# EAGLE board M5StickSub (EAGLE 9.6.2)
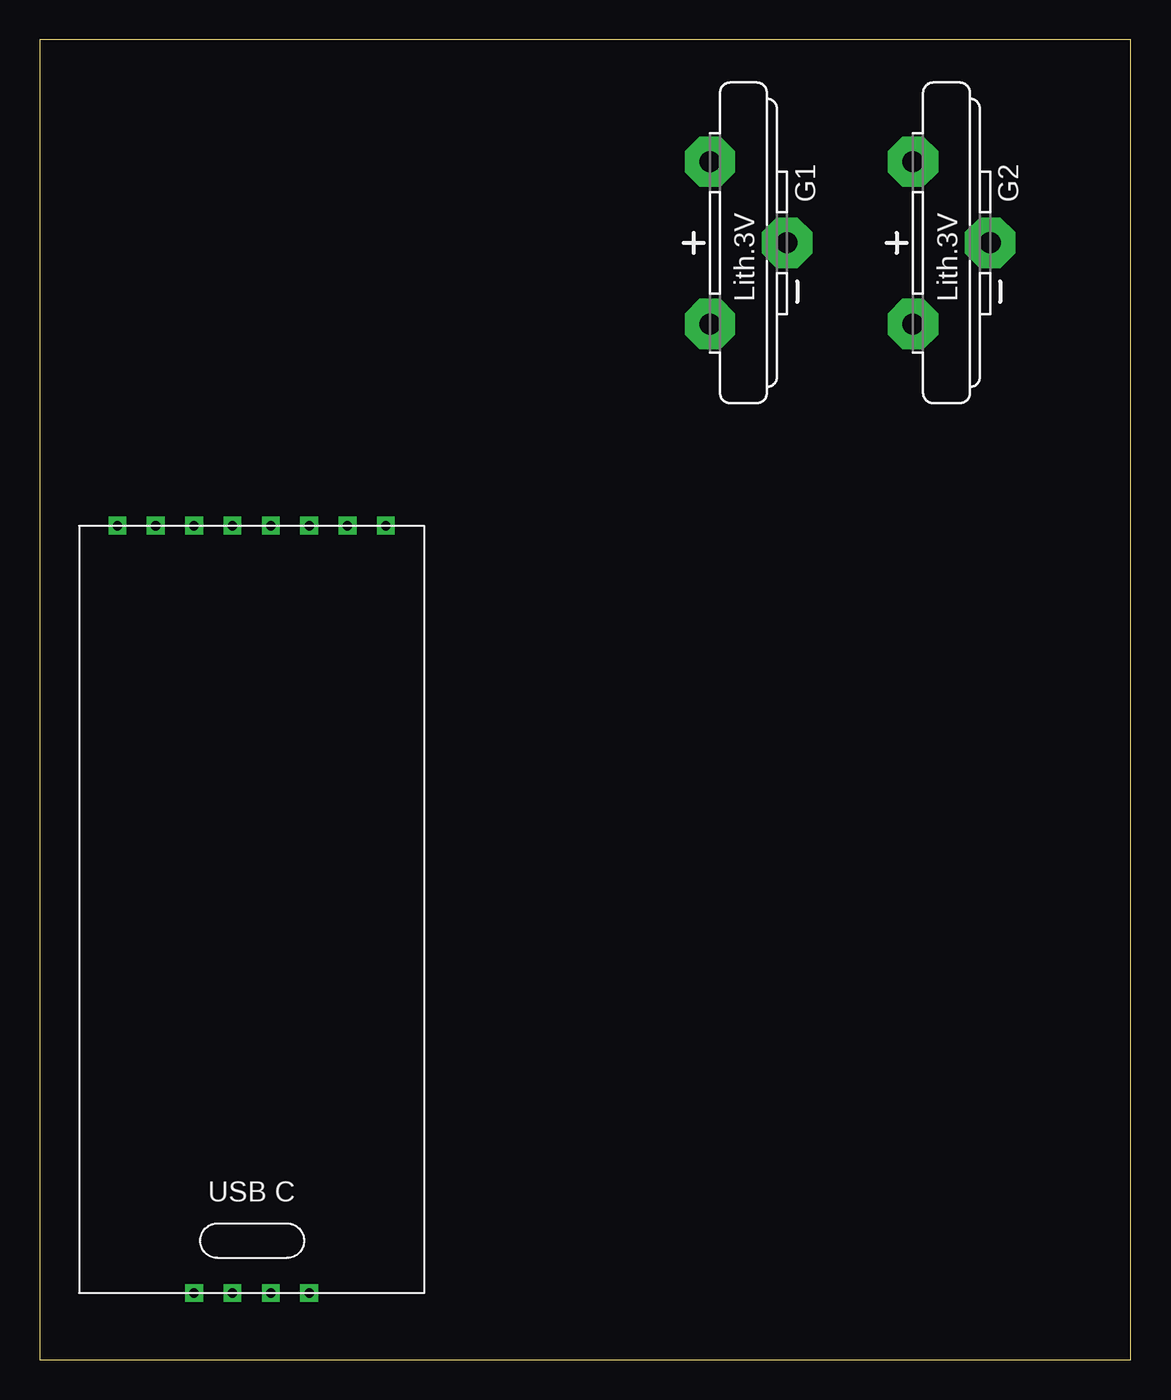
[diagram p0: board, top side]
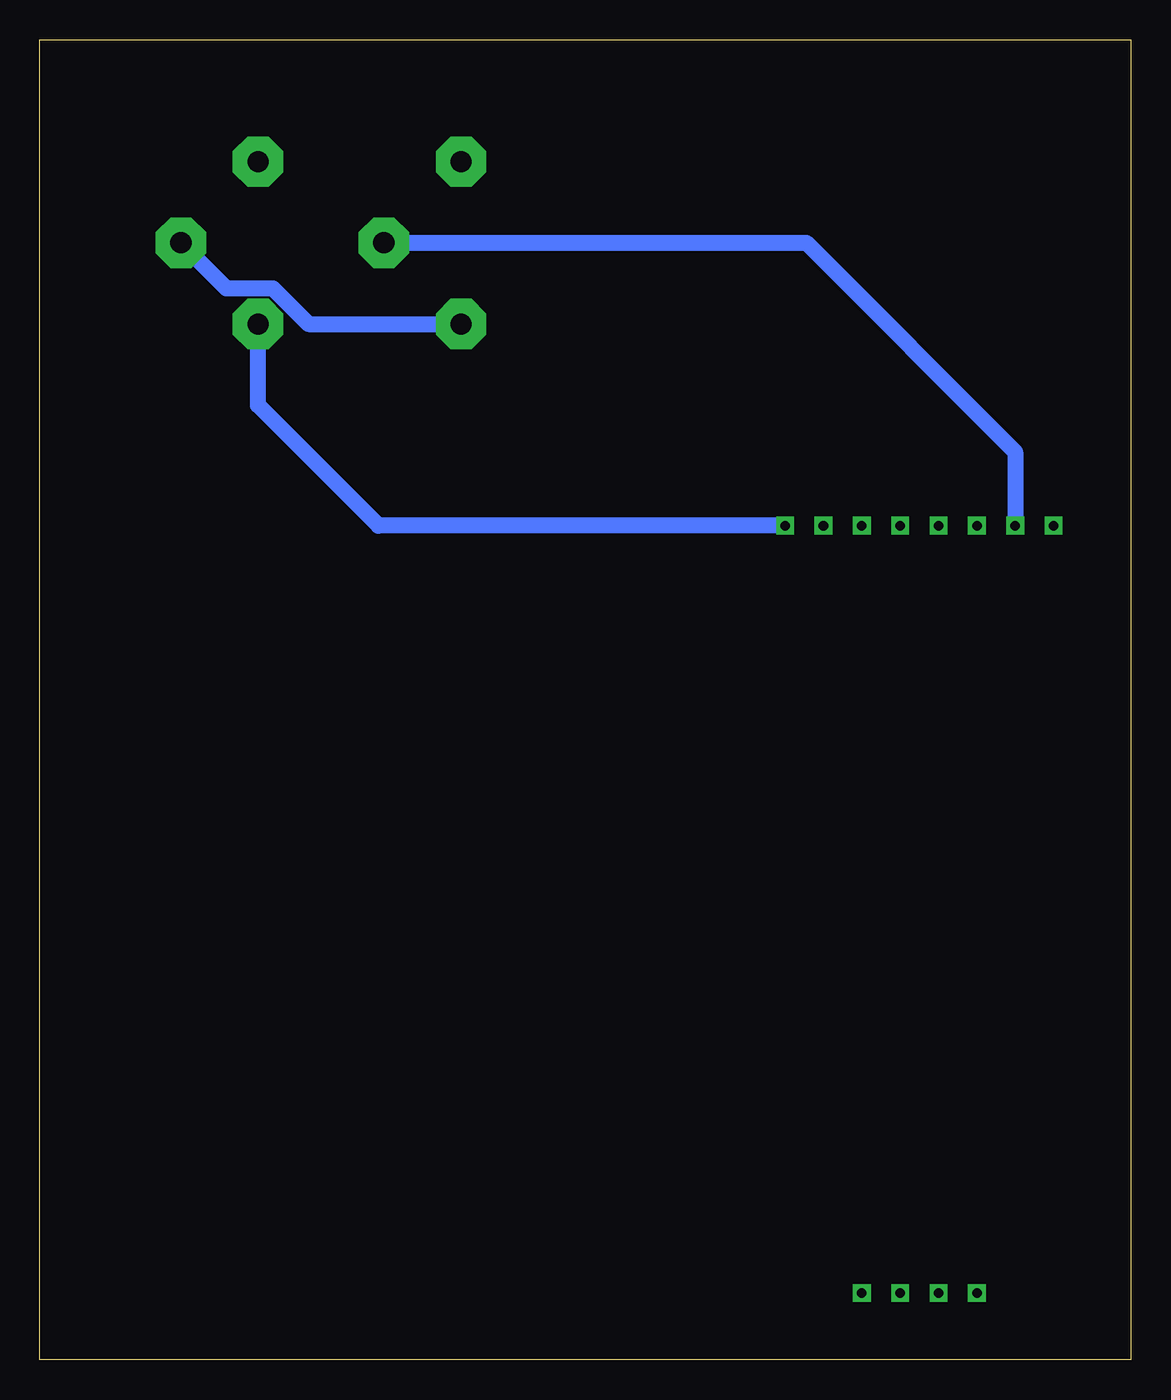
[diagram p1: board, bottom side, seen from below]

Size 68.25 x 82.54 mm. Coordinates in mm from the lower left corner, seen from the top.
Outline: 0,0 68.25,0 68.25,82.54 0,82.54 0,0
Copper layers (1*16): Top 0.035mm / dielectric 1.5mm / Bottom 0.035mm
Design rules "default": minimum track width 6mil, minimum drill 0.35mm, track to track 6mil, track to pad 6mil, pad to pad 6mil, via to via 6mil, smd to smd 6mil, copper to edge 40mil, drill to drill 6mil, minimum pad ring 10mil, minimum via ring 8mil, stop-mask expansion 4mil, vias tented up to drill 0mil, thermal gap 10mil

## Footprints (pad centres in the part's own frame; a part is rotated, then mirrored left to right if it is on the bottom)
CR2032V = drill 1.321 pad 3.15 octagon: + -2.54,-5.08; +@1 -2.54,5.08; - 2.286,0
M5STICK = drill 0.6 square: 3V3 105.6,-1329.6; 5VIN 108,-1329.6; 5VOUT 93.6,-1329.6; BAT 103.2,-1329.6; G26 96,-1329.6; G32 100.8,-1377.6; G33 103.2,-1377.6; G36/G25 98.4,-1329.6; GND 91.2,-1329.6; GND1 96,-1377.6; GO 100.8,-1329.6; VOUT 98.4,-1377.6

## Placement (x,y rotation side)
G1  CR2032V  [CR2032V]  44.45,69.85 0 top
G2  CR2032V  [CR2032V]  57.15,69.85 0 top
U$1  M5STICKCPLUS  [M5STICK]  -86.36,1381.76 0 top

## Library data of the parts
G1 G2 = battery
U$1 = M5stickcPlus

## Nets
N$1: G1.+ G2.-
N$2: G2.+ U$1.5VIN
N$3: G1.- U$1.5VOUT

## Tracks (layer width: path | path; a pad name or v marks a point on that pad's centre or on a via)
N$1
  Bottom 1.016: G2.- 56.59,67.01 53.68,67.01 51.45,64.77 G1.+
N$2
  Bottom 1.016: U$1.5VIN 47.08,52.16 54.61,59.69 G2.+
N$3
  Bottom 1.016: U$1.5VOUT 7.24,56.77 20.32,69.85 G1.-